# Altium PCB DynamicComplexModulo_v1i1.PcbDoc
Units mm, origin at the board's own origin, x right, y up, seen from the top; angles counter-clockwise.
Board outline 30 x 68 mm, 4 copper layers (Component Side, Ground Plane, Power Plane, Solder Side), stack 0.844 mm thick; 45 components, 50 nets, 246 pads, 42 vias.
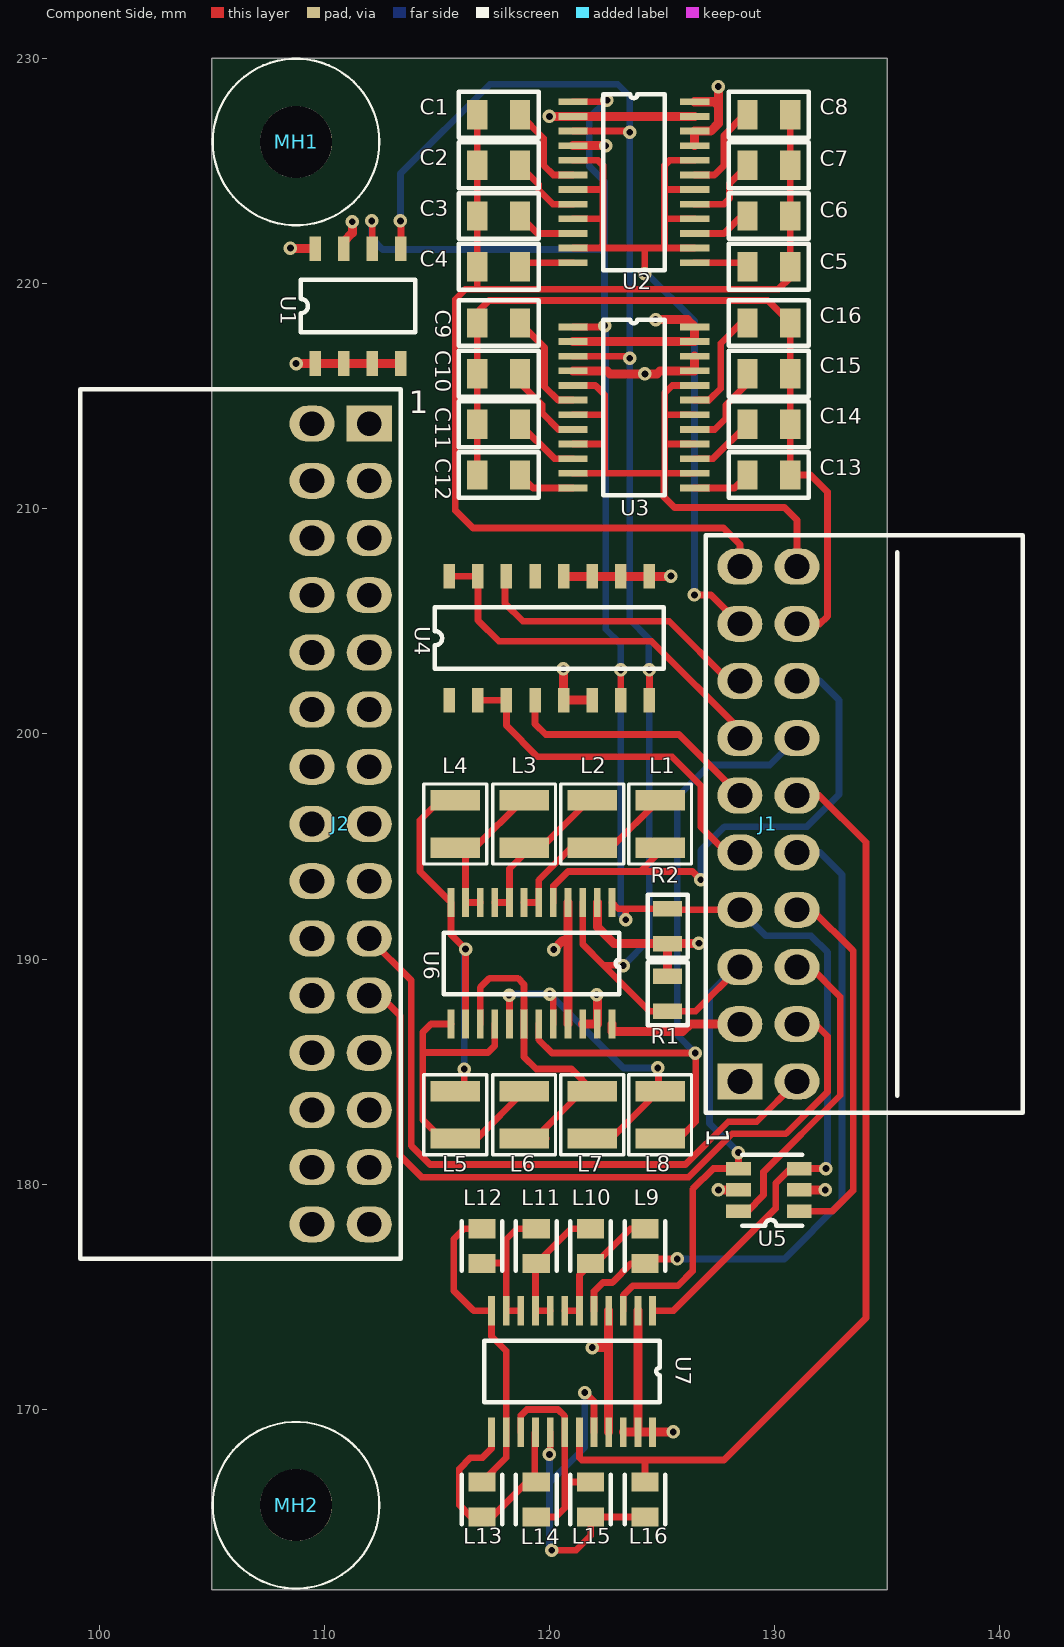
[diagram p0: Component Side view]
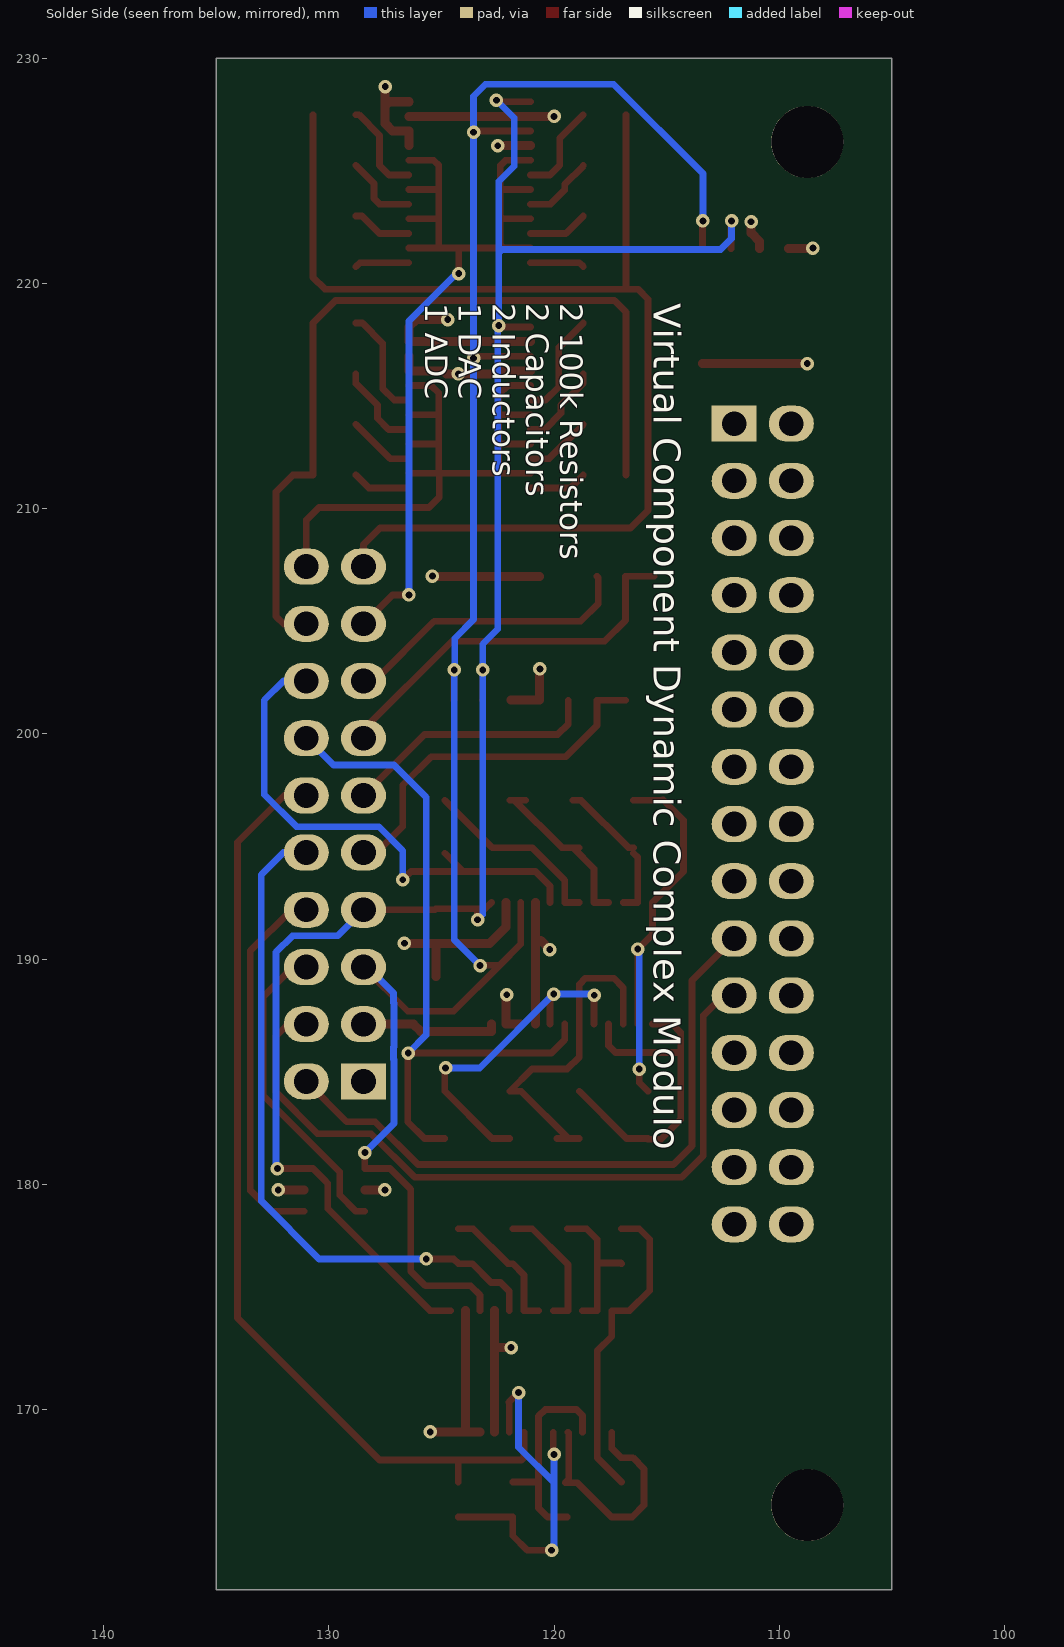
[diagram p1: Solder Side view, seen from below]
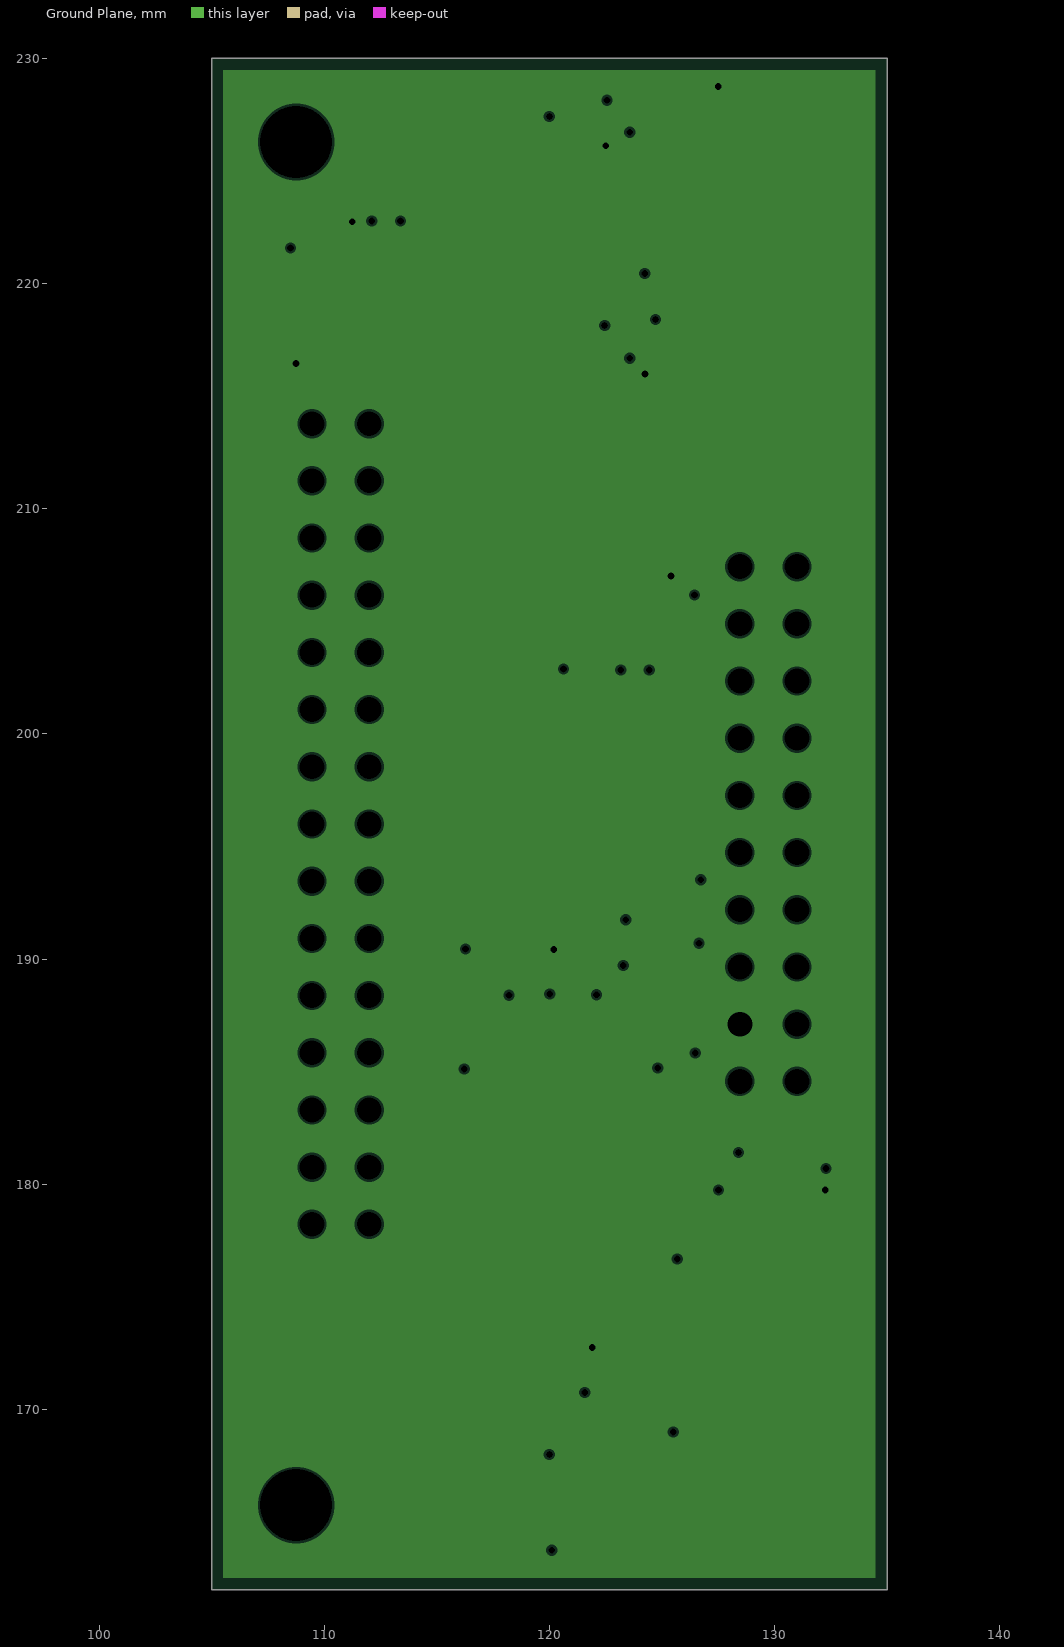
[diagram p2: Ground Plane, clearances drawn from the general rule]
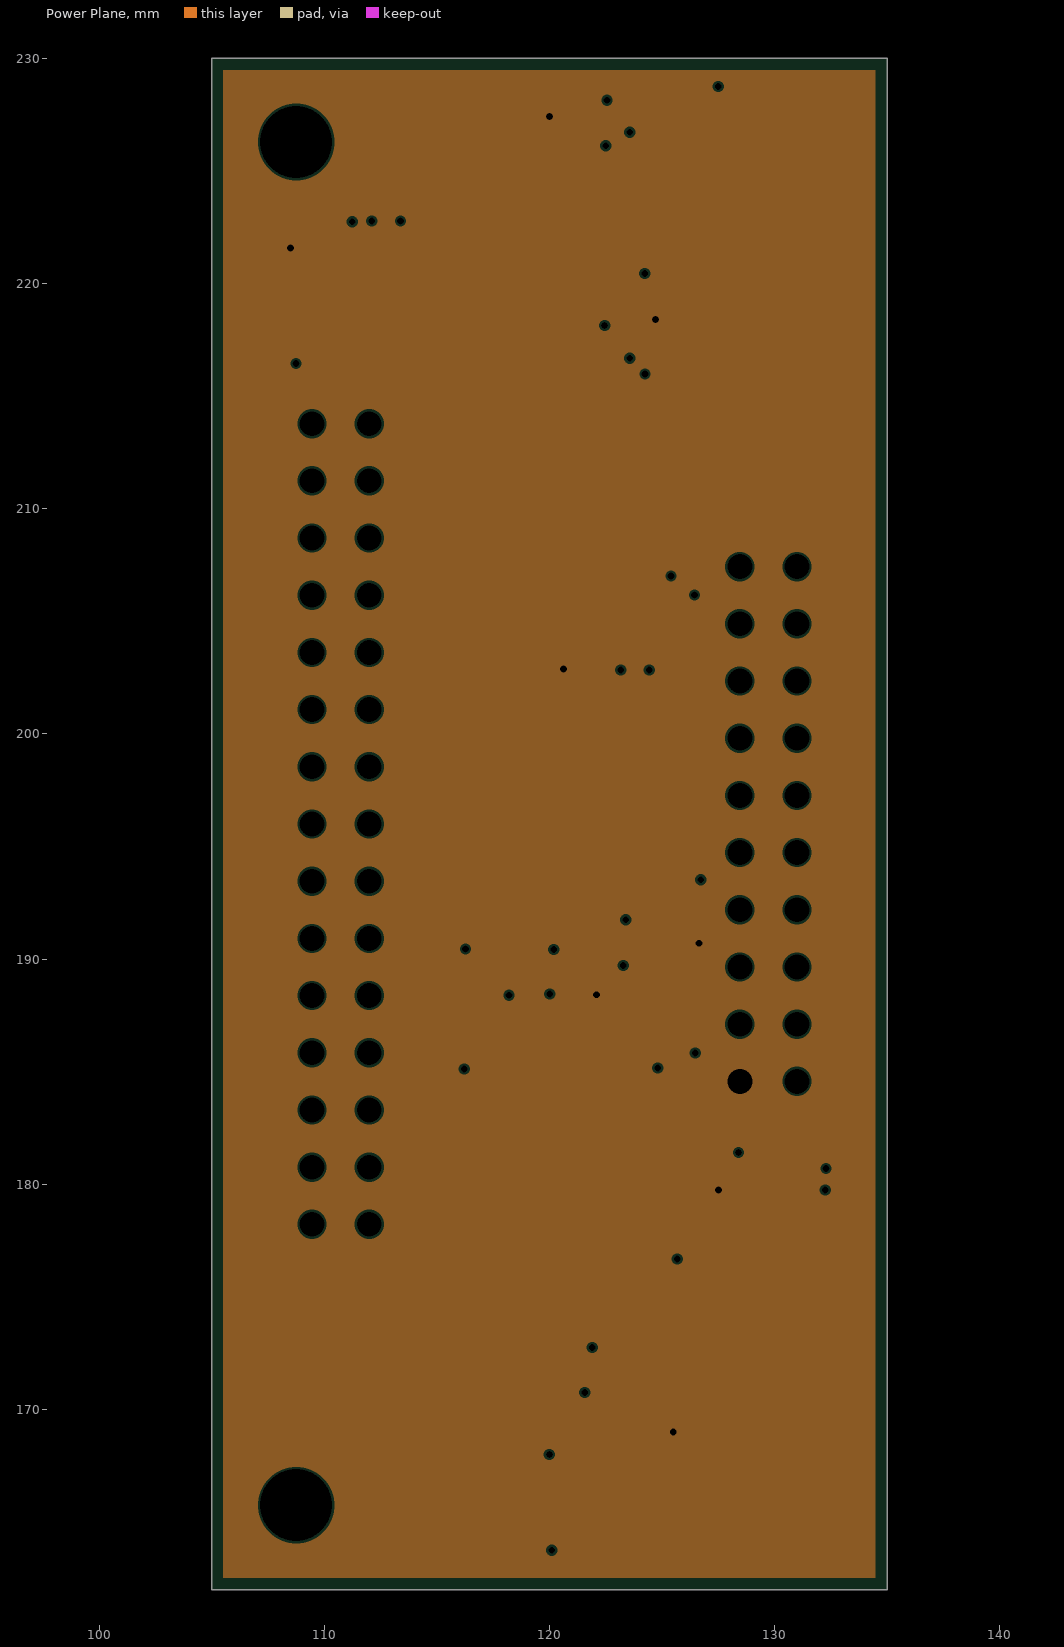
[diagram p3: Power Plane, clearances drawn from the general rule]
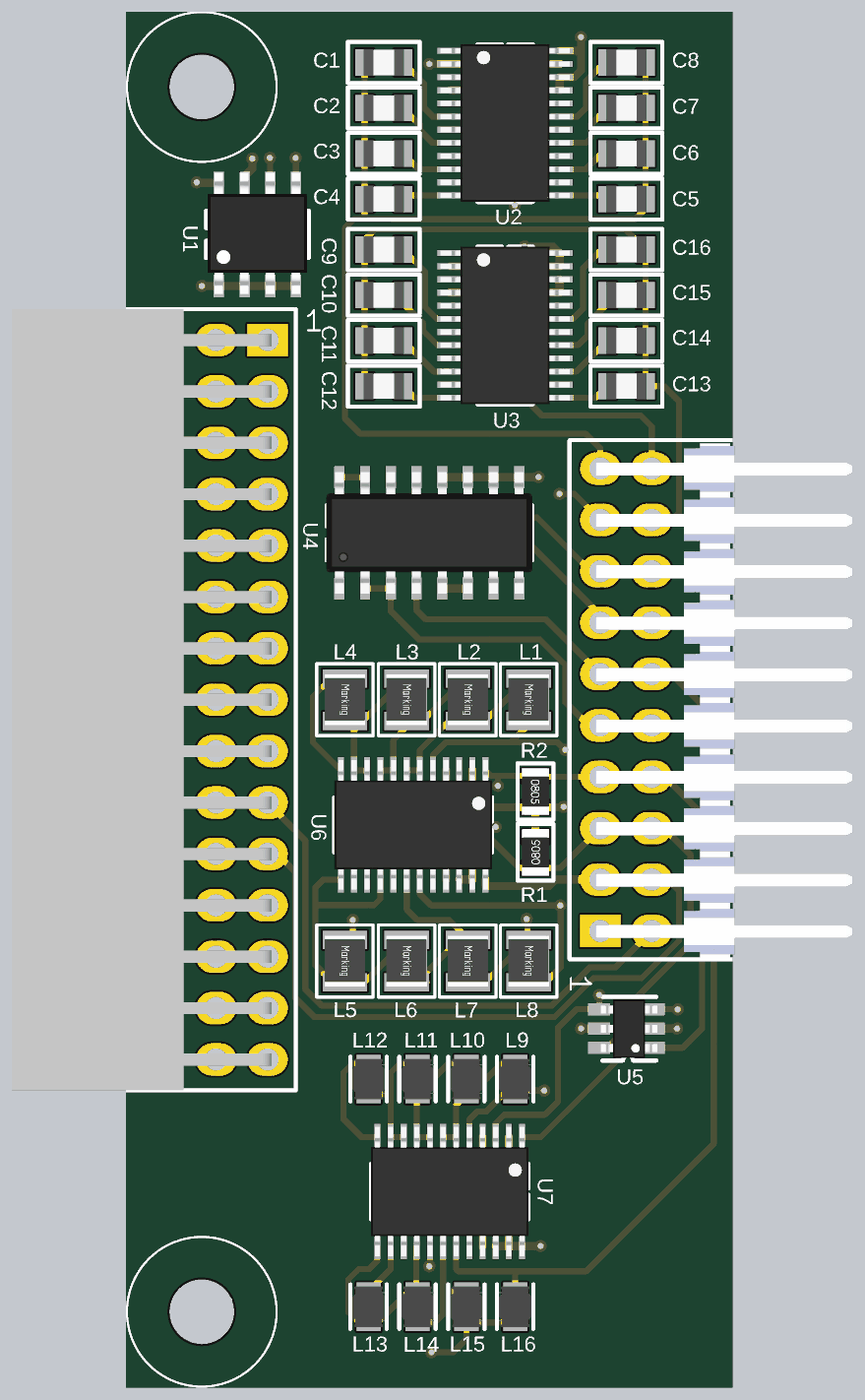
[diagram p4: 3D render of the assembled board from above, using the file's embedded part models]

## Layer stack, top to bottom
Top Solder: solder mask 0.0102, Solder Resist, Dk 3.5
Component Side: signal copper 0.0356
Dielectric 1: core 0.32, FR-4, Dk 4.8
Ground Plane: plane copper 0.036, net GND
Dielectric 3: prepreg 0.127, Dk 4.2
Power Plane: plane copper 0.036, net +5
Dielectric 4: core 0.254, Dk 4.2
Solder Side: signal copper 0.0356
Bottom Solder: solder mask 0.0102, Solder Resist, Dk 3.5

## Board outline
105,162 105,230 135,230 135,162

## Design rules (kind name [scope] priority, off if disabled: settings)
Clearance "Around polygon" [IsRegion] p1: gap=0.3 ignorepadtopadclearanceinfootprint=FALSE
Clearance [All] p2: gap=0.2 ignorepadtopadclearanceinfootprint=FALSE
ComponentClearance [All] p1: gap=0.2 collisioncheckmode=3 verticalgap=0.2 showdistances=FALSE
HoleSize [All] p1: absolutevalues=TRUE maxlimit=3.5 minlimit=0.2 maxpercent=80.000 minpercent=20.000
HoleToHoleClearance [All] p1: gap=0.305 allowstackedmicrovias=TRUE
MinimumSolderMaskSliver [All] p1: minsoldermaskwidth=0.3
PlaneClearance [All] p1: clearance=0.1
PlaneConnect [All] p1: planeconnectstyle=Direct reliefexpansion=0.508 reliefentries=4 reliefconductorwidth=0.254 reliefairgap=0.254
PolygonConnect [All] p1: connectstyle=Direct reliefconductorwidth=0.254 reliefentries=4 polygonreliefangle="90 Angle" airgapwidth=0.254
RoutingVias [All] p1: holewidth=0.3 width=0.6 viastyle="Through Hole" minholewidth=0.3 minwidth=0.6 maxholewidth=0.3 maxwidth=0.6
SilkToSilkClearance [All] p1: silktosilkclearance=0.1
SilkToSolderMaskClearance [IsPad] p1: minsilkscreentomaskgap=0.1 clearancetoexposedcopper=TRUE
SolderMaskExpansion [All] p1: expansion=0.1
Width Width_POWER [InNet ('+*') or InNet('GND')] p1: maxlimit=3 minlimit=0.4 preferedwidth=0.4
Width [All] p2: maxlimit=0.5 minlimit=0.3 preferedwidth=0.4
22 further rules are at their usual default settings.

## Classes and differential pairs
component class VirtualInductor: L1 L2 L3 L4 L5 L6 L7 L8 L9 L10 L11 L12 L13 L14 L15 L16 U6 U7
component class VirtualCap: C1 C2 C3 C4 C5 C6 C7 C8 C9 C10 C11 C12 C13 C14 C15 C16 U2 U4
component class DynamicComplexModulo_v1i1: J1 J2 MH1 MH2 R1 R2 U3 U4 U5

## Components (designator, comment, footprint, x,y, rotation, side; value= is the part's Value field where it differs from the comment)
C1 "100p" C0805 117.75,227.5 r180 top
C2 "200p" C0805 117.75,225.25 r180 top
C3 "330p" C0805 117.75,223 r180 top
C4 "470p" C0805 117.75,220.75 r180 top
C5 "1n" C0805 129.75,220.75 r0 top
C6 "2.2n" C0805 129.75,223 r0 top
C7 "3.3n" C0805 129.75,225.25 r0 top
C8 "4.7n" C0805 129.75,227.5 r0 top
C9 "10n" C0805 117.75,218.25 r180 top
C10 "22n" C0805 117.75,216 r180 top
C11 "33n" C0805 117.75,213.75 r180 top
C12 "47n" C0805 117.75,211.5 r180 top
C13 "100n" C0805 129.75,211.5 r0 top
C14 "220n" C0805 129.75,213.75 r0 top
C15 "330n" C0805 129.75,216 r0 top
C16 "470n" C0805 129.75,218.25 r0 top
J1 "PRPC010DBAN-M71RC" HDR_MALE_10x2x2.54 128.46,184.57 r180 top locked
J2 "PPPC152LJBN-RC" HDR_FEMALE_15x2x2.54 111.492,213.78 r0 top locked
L1 "WE-KI, 744762110A" WE-KI_1008A 124.914,196 r270 top value=10nH
L2 "WE-KI, 744762127A" WE-KI_1008A 121.905,196 r270 top value=27nH
L3 "WE-KI, 744762139A" WE-KI_1008A 118.877,196 r270 top value=39nH
L4 "WE-KI, 744762168A" WE-KI_1008A 115.824,196 r270 top value=68nH
L5 "WE-KI, 744762210A" WE-KI_1008A 115.824,183.082 r270 top value=100nH
L6 "WE-KI, 744762215A" WE-KI_1008A 118.877,183.082 r270 top value=150nH
L7 "WE-KI, 744762222A" WE-KI_1008A 121.905,183.082 r270 top value=220nH
L8 "WE-KI, 744762233A" WE-KI_1008A 124.914,183.082 r270 top value=330nH
L9 "1 uH" WE-LQS_2010 124.25,177.25 r270 top
L10 "1.5 uH" WE-LQS_2010 121.833,177.25 r270 top
L11 "2.2 uH" WE-LQS_2010 119.417,177.25 r270 top
L12 "2.5 uH" WE-LQS_2010 117,177.25 r270 top
L13 "3.3 uH" WE-LQS_2010 117,166 r270 top
L14 "4.7 uH" WE-LQS_2010 119.417,166 r270 top
L15 "6.8 uH" WE-LQS_2010 121.833,166 r270 top
L16 "10 uH" WE-LQS_2010 124.25,166 r90 top
MH1 "MH 3.2mm NP" MH3.2mm 108.75,226.289 r0 top
MH2 "MH 3.2mm NP" MH3.2mm 108.75,165.75 r0 top
R1 "4.7k" R0805 125.25,188.46 r90 top
R2 "4.7k" R0805 125.25,191.46 r270 top
U1 "AT24C256C-SSHL-B" AT24C256C-SSHL-B 111.5,219 r90 top
U2 "ADG715BRUZ" ADG715BRUZ 123.75,224.5 r0 top
U3 "ADG715BRUZ" ADG715BRUZ 123.75,214.5 r0 top
U4 "AD5242BRZ100" AD5242BRZ100 120,204.25 r90 top
U5 "296-14461-1-ND" SOT23-6 129.75,179.75 r180 top
U6 "ADG715BRUZ_1" ADG715BRUZ 119.202,189.814 r270 top
U7 "ADG715BRUZ_1" ADG715BRUZ 121.009,171.688 r270 top

## Footprints (in the part's own frame and the unit in brackets; to place one, negate y for a bottom-side part, rotate by r counter-clockwise, add the part's x,y. Pads: shape width x height; smd on the part's side, far side on the other; paste and mask are expansions set on the pad)
AD5242BRZ100 [mm]
  rect 1.1x0.51 smd mask+0.02: 1(-2.75,4.445) 2(-2.75,3.175) 3(-2.75,1.905) 4(-2.75,0.635) 5(-2.75,-0.635) 6(-2.75,-1.905) 7(-2.75,-3.175) 8(-2.75,-4.445) 9(2.75,-4.445) 10(2.75,-3.175) 11(2.75,-1.905) 12(2.75,-0.635) 13(2.75,0.635) 14(2.75,1.905) 15(2.75,3.175) 16(2.75,4.445)
  silkscreen extent -1.37,-5.08 1.37,5.08, body extent -3,-5.1 3,5.1, height 1.7
ADG715BRUZ [mm]
  rect 1.3x0.3 smd mask+0.02: 1(-2.7,3.575) 2(-2.7,2.925) 3(-2.7,2.275) 4(-2.7,1.625) 5(-2.7,0.975) 6(-2.7,0.325) 7(-2.7,-0.325) 8(-2.7,-0.975) 9(-2.7,-1.625) 10(-2.7,-2.275) 11(-2.7,-2.925) 12(-2.7,-3.575) 13(2.7,-3.575) 14(2.7,-2.925) 15(2.7,-2.275) 16(2.7,-1.625) 17(2.7,-0.975) 18(2.7,-0.325) 19(2.7,0.325) 20(2.7,0.975) 21(2.7,1.625) 22(2.7,2.275) 23(2.7,2.925) 24(2.7,3.575)
  silkscreen extent -1.37,-3.9 1.37,3.9, body extent -3.2,-3.9 3.2,3.9, height 1.06
AT24C256C-SSHL-B [mm]
  rect 1.1x0.51 smd mask+0.02: 1(-2.55,1.905) 2(-2.55,0.635) 3(-2.55,-0.635) 4(-2.55,-1.905) 5(2.55,-1.905) 6(2.55,-0.635) 7(2.55,0.635) 8(2.55,1.905)
  silkscreen extent -1.17,-2.54 1.17,2.54, body extent -2.95,-2.44 3.05,2.46, height 1.75
C0805 [mm]
  rect 0.9x1.3 smd: 1(-0.95,0) 2(0.95,0)
  silkscreen extent -1.78,-1.02 1.78,1.02, body extent -1,-0.66 1,0.66, height 0.74
HDR_FEMALE_15x2x2.54 [mm]
  rect 2x1.6 hole 1.1: 1(0.508,0)
  oval 2x1.6 hole 1.1: 2(-2.032,0) 3(0.508,-2.54) 4(-2.032,-2.54) 5(0.508,-5.08) 6(-2.032,-5.08) 7(0.508,-7.62) 8(-2.032,-7.62) 9(0.508,-10.16) 10(-2.032,-10.16) 11(0.508,-12.7) 12(-2.032,-12.7) 13(0.508,-15.24) 14(-2.032,-15.24) 15(0.508,-17.78) 16(-2.032,-17.78) 17(0.508,-20.32) 18(-2.032,-20.32) 19(0.508,-22.86) 20(-2.032,-22.86) 21(0.508,-25.4) 22(-2.032,-25.4) 23(0.508,-27.94) 24(-2.032,-27.94) 25(0.508,-30.48) 26(-2.032,-30.48) 27(0.508,-33.02) 28(-2.032,-33.02) 29(0.508,-35.56) 30(-2.032,-35.56)
  silkscreen extent -12.32,-37.08 1.91,1.52, body extent -12.14,-37.08 0.71,1.52, height 5.08
HDR_MALE_10x2x2.54 [mm] "PRPC010DBAN-M71RC"
  rect 2x1.6 hole 1.1: 1(0,0)
  oval 2x1.6 hole 1.1: 2(0,-2.54) 4(0,-7.62) 5(0,-10.16) 6(0,-12.7) 7(0,-15.24) 8(0,-17.78) 9(0,-20.32) 10(0,-22.86) 11(-2.54,-22.86) 12(-2.54,-20.32) 13(-2.54,-17.78) 14(-2.54,-15.24) 15(-2.54,-12.7) 16(-2.54,-10.16) 17(-2.54,-7.62) 19(-2.54,-2.54) 20(-2.54,0)
  oval 2x1.6 hole 1.1 mask+0.102: 3(0,-5.08) 18(-2.54,-5.08)
  silkscreen extent -12.57,-24.26 1.52,1.4, body extent -12.47,-24.1 0.25,1.3, height 5.45
MH3.2mm [mm] "MHNP 3.2mm"
  round 3.2 hole 3.2 unplated: 1(0,0)
  silkscreen extent -3.7,-3.7 3.7,3.7
R0805 [mm]
  rect 0.7x1.3 smd: 1(-0.775,0) 2(0.775,0)
  silkscreen extent -1.4,-0.89 1.4,0.89, body extent -1.15,-0.67 1.15,0.68, height 0.77
SOT23-6 [mm]
  rect 1.1x0.6 smd mask+0.02: 1(-1.35,0.95) 2(-1.35,0) 3(-1.35,-0.95) 4(1.35,-0.95) 5(1.35,0) 6(1.35,0.95)
  silkscreen extent -1.48,-1.56 1.19,1.59, body extent -1.53,-1.44 1.27,1.46, height 1.45
WE-KI_1008A [mm] "SMD Wire Wound Ceramic Inductor, body 2.5x2"
  rect 0.9x2.2 smd: 1(-1.05,0) 2(1.05,0)
  silkscreen extent -1.78,-1.4 1.78,1.4, body extent -1.25,-1 1.25,1, height 1.12
WE-LQS_2010 [mm] "SMD Power Inductor, 2-Leads, body 2.2x1.8mm"
  rect 0.85x1.2 smd: 1(-0.775,0) 2(0.775,0)
  silkscreen extent -1.1,-0.9 1.1,0.9, body extent -1,-0.8 1,0.82, height 1.01

## Part data
C1: library part C805_100p
C2: library part C805_200p
C3: library part C805_330p
C4: library part C805_470p
C5: library part C805_1n
C6: library part C805_2.2n
C7: library part C805_3.3n
C8: library part C805_4.7n
C9: library part C805_10n
C10: library part C805_22n
C11: library part C805_33n
C12: library part C805_47n
C13: library part C805_100n
C14: library part C805_220n
C15: library part C805_330n
C16: library part C805_470n
J1: library part "HDR Male 2x10_2.54", "20 Positions Header, Unshrouded, Breakaway Connector 0.100\" (2.54mm) Through Hole, Right Angle Gold", Colour=Black, Manufacturer=Sullins, Package Quantity=1, Supplier Part Number 1=S2111EC-10-ND, ComponentLink1Description=https://datasheet.ciiva.com/741/xrxczzzdxxn-m71rc-11639-b-741675.pdf, ComponentLink1URL=https://datasheet.ciiva.com/741/xrxczzzdxxn-m71rc-11639-b-741675.pdf, Connector Type="Male Pin", Contact Mating Length=0.23inch, Contact Plating=Gold, Manufacturer Part Number=PRPC010DBAN-M71RC, Mount="Through Hole", Number of Positions=20, Number of Rows=2, Packaging=Bulk, Pitch=0.1inch, Pricing 1="1=1.08, 10=0.97, 100=0.7989, 500=0.6315, 1000=0.5421, 5000=0.49455, 10000=0.47553 (USD)", Row Spacing=0.1inch, Stock 1=459, Supplier 1=Digi-Key, System=Connector, Termination=Solder
J2: library part OPENSCOPE_CONNECTOR, "CONN FMALE 30POS DL .1\" R/A GOLD", Colour=Black, Manufacturer=Sullins, Package Quantity=1000, Supplier Part Number 1=S5568-ND, ComponentLink1Description=http://sullinscorp.com/drawings/101_P(N)PxCxx2LJBN-RC,_10494-H.pdf, ComponentLink1URL=http://sullinscorp.com/drawings/101_P(N)PxCxx2LJBN-RC,_10494-H.pdf, Connector Type=Socket,Header, Contact Material=Bronze, Contact Plating=Gold, Height=5mm, Housing Colour=Black, Housing Material=Plastic, Lead Free="Lead Free", Length=38.6mm, Manufacturer Part Number=PPPC152LJBN-RC, Mount="Through Hole", Number of Positions=30, Number of Rows=2, Packaging=Bulk, Pitch=0.1inch, Pricing 1="1=2.22, 10=2.018, 100=1.7294, 500=1.44112, 1000=1.23525, 5000=1.1895 (USD)", Row Spacing=0.1inch, Stock 1=2029, Supplier 1=Digi-Key, Termination=Solder, Width=8.5mm
L1: "WE-KI SMD Wire Wound Ceramic Inductor, size 1008A, 10nH", PartNumber=744762110A, Supplier Part Number 1=732-1808-6-ND, ComponentLink1Description=Manufacturer, ComponentLink1URL=http://www.we-online.de, ComponentLink2Description=Datasheet, ComponentLink2URL=http://katalog.we-online.de/pbs/datasheet/744762110A.pdf, PublishedDate="Sep. 2016", Publisher="Wurth Elektronik", Size=1008A, Supplier 1=Digi-Key
L2: "WE-KI SMD Wire Wound Ceramic Inductor, size 1008A, 27nH", PartNumber=744762127A, Supplier Part Number 1=732-1813-6-ND, ComponentLink1Description=Manufacturer, ComponentLink1URL=http://www.we-online.de, ComponentLink2Description=Datasheet, ComponentLink2URL=http://katalog.we-online.de/pbs/datasheet/744762127A.pdf, PublishedDate="Sep. 2016", Publisher="Wurth Elektronik", Size=1008A, Supplier 1=Digi-Key
L3: "WE-KI SMD Wire Wound Ceramic Inductor, size 1008A, 39nH", PartNumber=744762139A, Supplier Part Number 1=732-1815-6-ND, ComponentLink1Description=Manufacturer, ComponentLink1URL=http://www.we-online.de, ComponentLink2Description=Datasheet, ComponentLink2URL=http://katalog.we-online.de/pbs/datasheet/744762139A.pdf, PublishedDate="Sep. 2016", Publisher="Wurth Elektronik", Size=1008A, Supplier 1=Digi-Key
L4: "WE-KI SMD Wire Wound Ceramic Inductor, size 1008A, 68nH", PartNumber=744762168A, Supplier Part Number 1=732-1818-6-ND, ComponentLink1Description=Manufacturer, ComponentLink1URL=http://www.we-online.de, ComponentLink2Description=Datasheet, ComponentLink2URL=http://katalog.we-online.de/pbs/datasheet/744762168A.pdf, PublishedDate="Sep. 2016", Publisher="Wurth Elektronik", Size=1008A, Supplier 1=Digi-Key
L5: "WE-KI SMD Wire Wound Ceramic Inductor, size 1008A, 100nH", PartNumber=744762210A, Supplier Part Number 1=732-1820-6-ND, ComponentLink1Description=Manufacturer, ComponentLink1URL=http://www.we-online.de, ComponentLink2Description=Datasheet, ComponentLink2URL=http://katalog.we-online.de/pbs/datasheet/744762210A.pdf, PublishedDate="Sep. 2016", Publisher="Wurth Elektronik", Size=1008A, Supplier 1=Digi-Key
L6: "WE-KI SMD Wire Wound Ceramic Inductor, size 1008A, 150nH", PartNumber=744762215A, Supplier Part Number 1=732-1822-6-ND, ComponentLink1Description=Manufacturer, ComponentLink1URL=http://www.we-online.de, ComponentLink2Description=Datasheet, ComponentLink2URL=http://katalog.we-online.de/pbs/datasheet/744762215A.pdf, PublishedDate="Sep. 2016", Publisher="Wurth Elektronik", Size=1008A, Supplier 1=Digi-Key
L7: "WE-KI SMD Wire Wound Ceramic Inductor, size 1008A, 220nH", PartNumber=744762222A, Supplier Part Number 1=732-1824-6-ND, ComponentLink1Description=Manufacturer, ComponentLink1URL=http://www.we-online.de, ComponentLink2Description=Datasheet, ComponentLink2URL=http://katalog.we-online.de/pbs/datasheet/744762222A.pdf, PublishedDate="Sep. 2016", Publisher="Wurth Elektronik", Size=1008A, Supplier 1=Digi-Key
L8: "WE-KI SMD Wire Wound Ceramic Inductor, size 1008A, 330nH", PartNumber=744762233A, Supplier Part Number 1=732-1826-6-ND, ComponentLink1Description=Manufacturer, ComponentLink1URL=http://www.we-online.de, ComponentLink2Description=Datasheet, ComponentLink2URL=http://katalog.we-online.de/pbs/datasheet/744762233A.pdf, PublishedDate="Sep. 2016", Publisher="Wurth Elektronik", Size=1008A, Supplier 1=Digi-Key
L9: library part 74404020010, "WE-LQS SMD Power Inductor, size 2010, 1 uH, 1.49 A", DC Resistance="0.095 Ohm", Manufacturer="Wurth Electronics", Operating Temperature="-40 to +125 degC", Rated Current max.="1.49 A", Supplier Part Number 1=732-10739-6-ND, ComponentLink1Description=Manufacturer, ComponentLink1URL=http://www.we-online.de, ComponentLink2Description=Datasheet, ComponentLink2URL=http://katalog.we-online.de/pbs/datasheet/74404020010.pdf, Inductance="1 uH", Manufacturer Part Number=74404020010, Part Number=74404020010, Pricing 1="1=0.56, 50=0.4698, 100=0.357, 1000=0.31007 (USD)", Published Date="Dec. 2017", Publisher="Wurth Elektronik", Size=2010, Stock 1=3959, Supplier 1=Digi-Key
L10: library part 74404020015, "WE-LQS SMD Power Inductor, size 2010, 1.5 uH, 1.19 A", DC Resistance="0.145 Ohm", Manufacturer="Wurth Electronics", Operating Temperature="-40 to +125 degC", Rated Current max.="1.19 A", Supplier Part Number 1=732-10740-6-ND, ComponentLink1Description=Manufacturer, ComponentLink1URL=http://www.we-online.de, ComponentLink2Description=Datasheet, ComponentLink2URL=http://katalog.we-online.de/pbs/datasheet/74404020015.pdf, Inductance="1.5 uH", Manufacturer Part Number=74404020015, Part Number=74404020015, Pricing 1="1=0.56, 50=0.4698, 100=0.357, 1000=0.31007 (USD)", Published Date="Dec. 2017", Publisher="Wurth Elektronik", Size=2010, Stock 1=3931, Supplier 1=Digi-Key
L11: library part 74404020022, "WE-LQS SMD Power Inductor, size 2010, 2.2 uH, 0.96 A", DC Resistance="0.22 Ohm", Manufacturer="Wurth Electronics", Operating Temperature="-40 to +125 degC", Rated Current max.="0.96 A", Supplier Part Number 1=732-10741-6-ND, ComponentLink1Description=Manufacturer, ComponentLink1URL=http://www.we-online.de, ComponentLink2Description=Datasheet, ComponentLink2URL=http://katalog.we-online.de/pbs/datasheet/74404020022.pdf, Inductance="2.2 uH", Manufacturer Part Number=74404020022, Part Number=74404020022, Pricing 1="1=0.56, 50=0.4698, 100=0.357, 1000=0.31007 (USD)", Published Date="Dec. 2017", Publisher="Wurth Elektronik", Size=2010, Stock 1=3236, Supplier 1=Digi-Key
L12: library part 74405020022, "WE-LQS SMD Power Inductor, size 2010, 2.5 uH, 0.96 A", DC Resistance="0.22 Ohm", Inductance="2.2 uH", Manufacturer="Wurth Electronics", Manufacturer Part Number=74404020022, Operating Temperature="-40 to +125 degC", Rated Current max.="0.96 A", Supplier Part Number 1=732-10770-6-ND, ComponentLink1Description=Manufacturer, ComponentLink1URL=http://www.we-online.de, ComponentLink2Description=Datasheet, ComponentLink2URL=http://katalog.we-online.de/pbs/datasheet/74404020022.pdf, Part Number=74404020022, Pricing 1="1=0.63, 50=0.522, 100=0.3967, 1000=0.34451 (USD)", Published Date="Dec. 2017", Publisher="Wurth Elektronik", Size=2010, Stock 1=4000, Supplier 1=Digi-Key
L13: library part 74404020033, "WE-LQS SMD Power Inductor, size 2010, 3.3 uH, 0.87 A", DC Resistance="0.279 Ohm", Manufacturer="Wurth Electronics", Operating Temperature="-40 to +125 degC", Rated Current max.="0.87 A", Supplier Part Number 1=732-10742-6-ND, ComponentLink1Description=Manufacturer, ComponentLink1URL=http://www.we-online.de, ComponentLink2Description=Datasheet, ComponentLink2URL=http://katalog.we-online.de/pbs/datasheet/74404020033.pdf, Inductance="3.3 uH", Manufacturer Part Number=74404020033, Part Number=74404020033, Pricing 1="1=0.56, 50=0.4698, 100=0.357, 1000=0.31007 (USD)", Published Date="Dec. 2017", Publisher="Wurth Elektronik", Size=2010, Stock 1=3787, Supplier 1=Digi-Key
L14: library part 74404020047, "WE-LQS SMD Power Inductor, size 2010, 4.7 uH, 0.73 A", DC Resistance="0.399 Ohm", Manufacturer="Wurth Electronics", Operating Temperature="-40 to +125 degC", Rated Current max.="0.73 A", Supplier Part Number 1=732-10743-6-ND, ComponentLink1Description=Manufacturer, ComponentLink1URL=http://www.we-online.de, ComponentLink2Description=Datasheet, ComponentLink2URL=http://katalog.we-online.de/pbs/datasheet/74404020047.pdf, Inductance="4.7 uH", Manufacturer Part Number=74404020047, Part Number=74404020047, Pricing 1="1=0.56, 50=0.4698, 100=0.357, 1000=0.31007 (USD)", Published Date="Dec. 2017", Publisher="Wurth Elektronik", Size=2010, Stock 1=3398, Supplier 1=Digi-Key
L15: library part 74404020068, "WE-LQS SMD Power Inductor, size 2010, 6.8 uH, 0.56 A", DC Resistance="0.68 Ohm", Manufacturer="Wurth Electronics", Operating Temperature="-40 to +125 degC", Rated Current max.="0.56 A", Supplier Part Number 1=732-10744-6-ND, ComponentLink1Description=Manufacturer, ComponentLink1URL=http://www.we-online.de, ComponentLink2Description=Datasheet, ComponentLink2URL=http://katalog.we-online.de/pbs/datasheet/74404020068.pdf, Inductance="6.8 uH", Manufacturer Part Number=74404020068, Part Number=74404020068, Pricing 1="1=0.56, 50=0.4698, 100=0.357, 1000=0.31007 (USD)", Published Date="Dec. 2017", Publisher="Wurth Elektronik", Size=2010, Stock 1=3558, Supplier 1=Digi-Key
L16: library part 74404020100, "WE-LQS SMD Power Inductor, size 2010, 10 uH, 0.5 A", DC Resistance="0.85 Ohm", Manufacturer="Wurth Electronics", Operating Temperature="-40 to +125 degC", Rated Current max.="0.5 A", Supplier Part Number 1=732-10745-6-ND, ComponentLink1Description=Manufacturer, ComponentLink1URL=http://www.we-online.de, ComponentLink2Description=Datasheet, ComponentLink2URL=http://katalog.we-online.de/pbs/datasheet/74404020100.pdf, ComponentLink3Description=http://www.farnell.com/datasheets/2277209.pdf, ComponentLink3URL=http://www.farnell.com/datasheets/2277209.pdf, Inductance="10 uH", Manufacturer Part Number=74404020100, Part Number=74404020100, Pricing 1="1=0.56, 50=0.4698, 100=0.357, 1000=0.31007 (USD)", Published Date="Dec. 2017", Publisher="Wurth Elektronik", Size=2010, Stock 1=3185, Supplier 1=Digi-Key
MH1 MH2: library part MHNP, "Mounting hole 3.2mm non plated"
R1 R2: library part R0805_4.7k
U1: "ATMEL         AT24C256C-SSHL-B            EEPROM, 256 Kbit, 32K x 8bit, 1 MHz, Serial, SOIC, 8 Pins", Case/Package=SOIC, Frequency=1MHz, Manufacturer="Microchip / Atmel", Max Operating Temperature=85°C, Max Supply Voltage=5.5V, Min Operating Temperature=-40°C, Min Supply Voltage=1.7V, Nominal Supply Current=3mA, Package Quantity=100, Supplier Part Number 1=AT24C256C-SSHL-B-ND, Voltage=5V, Access Time=550ns, ComponentLink1Description=https://datasheet.ciiva.com/15123/getdatasheetpartid-367456-15123424.pdf, ComponentLink1URL=https://datasheet.ciiva.com/15123/getdatasheetpartid-367456-15123424.pdf, ComponentLink2Description=https://datasheet.ciiva.com/15123/getdatasheetpartid-304516-15123348.pdf, ComponentLink2URL=https://datasheet.ciiva.com/15123/getdatasheetpartid-304516-15123348.pdf, ComponentLink3Description=https://datasheet.ciiva.com/1910/atmel-8568-seeprom-at24c256c-datasheet-1910422.pdf, ComponentLink3URL=https://datasheet.ciiva.com/1910/atmel-8568-seeprom-at24c256c-datasheet-1910422.pdf, ComponentLink4Description=https://datasheet.ciiva.com/1509/1726561-1509879.pdf, ComponentLink4URL=https://datasheet.ciiva.com/1509/1726561-1509879.pdf, Contact Plating=Tin,Matte, Density=256Kb, Height=1.5mm, Interface=I2C,Serial,2-Wire, Length=5.05mm, Manufacturer Part Number=AT24C256C-SSHL-B, Max Frequency=1MHz, Memory Size=256Kb, Memory Type=EEPROM, Mount="Surface Mount", Number of Pins=8, Number of Words=32768, Packaging=Bulk, Pricing 1="1=0.68, 10=0.619, 25=0.6108, 100=0.543 (USD)", Radiation Hardening=No, REACH SVHC="No SVHC", Stock 1=4655, Supplier 1=Digi-Key, Width=3.99mm
U2 U3: "ANALOG DEVICES         ADG715BRUZ            Analogue Switch, Octal Channel, SPST, 8 Channels, 4.5 ohm, 2.7V to 5.5V, TSSOP, 24 Pins", Case/Package=TSSOP, Drain to Source Resistance=2.5R, Dual Supply Voltage=2.5V, High Level Output Current=30mA, Manufacturer="Analog Devices", Max Dual Supply Voltage=2.75V, Max Operating Temperature=85°C, Max Power Dissipation=125uW, Max Supply Current=20uA, Max Supply Voltage=5.5V, Min Dual Supply Voltage=2.25V, Min Operating Temperature=-40°C, Min Supply Voltage=2.7V, On-State Resistance=4.5R, Operating Supply Current=10uA, Package Quantity=62, Supplier Part Number 1=ADG715BRUZ-ND, -3db Bandwidth=155MHz, Bandwidth=155MHz, ComponentLink1Description=https://datasheet.ciiva.com/2978/adg714-715-2978656.pdf, ComponentLink1URL=https://datasheet.ciiva.com/2978/adg714-715-2978656.pdf, ComponentLink2Description=https://datasheet.ciiva.com/1668/adg714-715-1668978.pdf, ComponentLink2URL=https://datasheet.ciiva.com/1668/adg714-715-1668978.pdf, ComponentLink3Description=https://datasheet.ciiva.com/15127/getdatasheetpartid-123058-15127194.pdf, ComponentLink3URL=https://datasheet.ciiva.com/15127/getdatasheetpartid-123058-15127194.pdf, ComponentLink4Description=https://datasheet.ciiva.com/16637/adg714-715-16637994.pdf, ComponentLink4URL=https://datasheet.ciiva.com/16637/adg714-715-16637994.pdf, ComponentLink5Description=https://datasheet.ciiva.com/5797/adg714-715-5797179.pdf, ComponentLink5URL=https://datasheet.ciiva.com/5797/adg714-715-5797179.pdf, ComponentLink6Description=https://datasheet.ciiva.com/48708/001248020-da-01-en-ic-switch-octal-adg715bruz-tssop-24-adi-48708535.pdf, ComponentLink6URL=https://datasheet.ciiva.com/48708/001248020-da-01-en-ic-switch-octal-adg715bruz-tssop-24-adi-48708535.pdf, Contact Plating=Tin,Matte, Height=1.05mm, Interface=Serial, Lead Free="Contains Lead", Length=7.8mm, Manufacturer Part Number=ADG715BRUZ, Nominal Supply Current=20uA, Number of Bits=8, Number of Channels=8, Number of Circuits=8, Number of Inputs=8, Number of Outputs=8, Number of Pins=24, Packaging=Rail/Tube, Power Dissipation=125uW, Pricing 1="1=6.12, 62=5.19758, 124=4.50452, 558=3.83461, 1054=3.234 (USD)", Radiation Hardening=No, REACH SVHC="No SVHC", Stock 1=3027, Supplier 1=Digi-Key, Supply Type=Single,Dual, Throw Configuration=SPST, Turn-Off Delay Time=130ns, Turn-On Delay Time=140ns, Width=4.4mm
U4: library part AD5242BRZ100-REEL7, "IC POT DGTL DUAL 256POS 16SOIC", Case/Package=SOIC, Dual Supply Voltage=2.5V, Frequency=400kHz, Manufacturer="Analog Devices", Max Dual Supply Voltage=2.7V, Max Operating Temperature=105°C, Max Supply Current=100nA, Max Supply Voltage=5.5V, Min Dual Supply Voltage=2.3V, Min Operating Temperature=-40°C, Package Quantity=1000, Resistance=100kR, Temperature Coefficient=30ppm/°C, Tolerance=50%, -3db Bandwidth=650kHz, ComponentLink1Description=https://datasheet.ciiva.com/3046/ad5241-5242-3046354.pdf, ComponentLink1URL=https://datasheet.ciiva.com/3046/ad5241-5242-3046354.pdf, ComponentLink2Description=https://datasheet.ciiva.com/1339/ad5241-5242-1339036.pdf, ComponentLink2URL=https://datasheet.ciiva.com/1339/ad5241-5242-1339036.pdf, Contact Plating=Tin,Matte, Interface=I2C, Lead Free="Contains Lead", Manufacturer Part Number=AD5242BRZ100-REEL7, Memory Type=Volatile, Min Supply Voltage=2.7V, Mount="Surface Mount", Nominal Supply Current=100nA, Number of Circuits=2, Number of Elements=2, Number of Pins=16, Number of Positions=256, Number of Taps=256, Operating Supply Current=100nA, Packaging="Tape and Reel", Quiescent Current=100nA, Stock 1=881, Supplier 1=Digi-Key, Taper=Linear
U5: library part ADS1110A7IDBVT, "IC ADC 16-BIT I2C PROGBL SOT23-6", Case/Package=SOT-23-6, Manufacturer="Texas Instruments", Max Operating Temperature=125°C, Max Power Dissipation=1.75mW, Max Supply Voltage=5.5V, Min Operating Temperature=-40°C, Min Supply Voltage=2.7V, Nominal Supply Current=240uA, Operating Supply Voltage=5V, Package Quantity=250, Supplier Part Number 1=296-14468-6-ND, ComponentLink1Description=https://datasheet.ciiva.com/25993/ads1110-25993414.pdf, ComponentLink1URL=https://datasheet.ciiva.com/25993/ads1110-25993414.pdf, ComponentLink2Description=https://datasheet.ciiva.com/1262/ads1110-1262313.pdf, ComponentLink2URL=https://datasheet.ciiva.com/1262/ads1110-1262313.pdf, ComponentLink3Description=https://datasheet.ciiva.com/1262/ads1110-1262314.pdf, ComponentLink3URL=https://datasheet.ciiva.com/1262/ads1110-1262314.pdf, ComponentLink4Description=https://datasheet.ciiva.com/1262/ads1110-1262315.pdf, ComponentLink4URL=https://datasheet.ciiva.com/1262/ads1110-1262315.pdf, ComponentLink5Description=https://datasheet.ciiva.com/14260/sbas276a-14260046.pdf, ComponentLink5URL=https://datasheet.ciiva.com/14260/sbas276a-14260046.pdf, ComponentLink6Description=https://datasheet.ciiva.com/26800/ads1110a7idbvt-26800806.pdf, ComponentLink6URL=https://datasheet.ciiva.com/26800/ads1110a7idbvt-26800806.pdf, ComponentLink7Description=https://datasheet.ciiva.com/41461/001186690-da-01-en-ic-adc-16-bi-ads1110a7idbvt-sot-23-6-tid-41461014.pdf, ComponentLink7URL=https://datasheet.ciiva.com/41461/001186690-da-01-en-ic-adc-16-bi-ads1110a7idbvt-sot-23-6-tid-41461014.pdf, Contact Plating=Gold, Conversion Rate=128S/s, Differential Nonlinearity=1LSB, Interface=I2C, Lead Free="Lead Free", Manufacturer Part Number=ADS1110A7IDBVT, Mount="Surface Mount", Number of A/D Converters=1, Number of Analog Inputs=1, Number of Bits=16, Number of Channels=1, Number of Converters=1, Number of Elements=1, Number of Inputs=1, Number of Pins=6, Packaging="Tape and Reel", Polarity=Bipolar,Unipolar, Power Dissipation=1.75mW, Pricing 1="1=6.46, 10=5.805, 100=4.7561 (USD)", Radiation Hardening=No, Resolution=16b, Sampling Rate=0.128KS/s, Stock 1=469, Supplier 1=Digi-Key, Supply Type=Single
U6 U7: "ANALOG DEVICES         ADG715BRUZ            Analogue Switch, Octal Channel, SPST, 8 Channels, 4.5 ohm, 2.7V to 5.5V, TSSOP, 24 Pins", Case/Package=TSSOP, Drain to Source Resistance=2.5R, Dual Supply Voltage=2.5V, High Level Output Current=30mA, Manufacturer="Analog Devices", Manufacturer Part Number=ADG715BRUZ, Max Dual Supply Voltage=2.75V, Max Operating Temperature=85°C, Max Power Dissipation=125uW, Max Supply Current=20uA, Max Supply Voltage=5.5V, Min Dual Supply Voltage=2.25V, Min Operating Temperature=-40°C, Min Supply Voltage=2.7V, On-State Resistance=4.5R, Operating Supply Current=10uA, Package Quantity=62, Supplier Part Number 1=ADG715BRUZ-ND, -3db Bandwidth=155MHz, Bandwidth=155MHz, ComponentLink1Description=https://datasheet.ciiva.com/2978/adg714-715-2978656.pdf, ComponentLink1URL=https://datasheet.ciiva.com/2978/adg714-715-2978656.pdf, ComponentLink2Description=https://datasheet.ciiva.com/1668/adg714-715-1668978.pdf, ComponentLink2URL=https://datasheet.ciiva.com/1668/adg714-715-1668978.pdf, ComponentLink3Description=https://datasheet.ciiva.com/15127/getdatasheetpartid-123058-15127194.pdf, ComponentLink3URL=https://datasheet.ciiva.com/15127/getdatasheetpartid-123058-15127194.pdf, ComponentLink4Description=https://datasheet.ciiva.com/16637/adg714-715-16637994.pdf, ComponentLink4URL=https://datasheet.ciiva.com/16637/adg714-715-16637994.pdf, ComponentLink5Description=https://datasheet.ciiva.com/5797/adg714-715-5797179.pdf, ComponentLink5URL=https://datasheet.ciiva.com/5797/adg714-715-5797179.pdf, ComponentLink6Description=https://datasheet.ciiva.com/48708/001248020-da-01-en-ic-switch-octal-adg715bruz-tssop-24-adi-48708535.pdf, ComponentLink6URL=https://datasheet.ciiva.com/48708/001248020-da-01-en-ic-switch-octal-adg715bruz-tssop-24-adi-48708535.pdf, Contact Plating=Tin,Matte, Height=1.05mm, Interface=Serial, Lead Free="Contains Lead", Length=7.8mm, Nominal Supply Current=20uA, Number of Bits=8, Number of Channels=8, Number of Circuits=8, Number of Inputs=8, Number of Outputs=8, Number of Pins=24, Packaging=Rail/Tube, Power Dissipation=125uW, Pricing 1="1=6.12, 62=5.19758, 124=4.50452, 558=3.83461, 1054=3.234 (USD)", Radiation Hardening=No, REACH SVHC="No SVHC", Stock 1=3027, Supplier 1=Digi-Key, Supply Type=Single,Dual, Throw Configuration=SPST, Turn-Off Delay Time=130ns, Turn-On Delay Time=140ns, Width=4.4mm

## Via types
v1: diameter 0.6, hole 0.3, Component Side to Solder Side, tented both sides, 34 vias
v2: diameter 0.6/0.6 (per signal layer), hole 0.3, Component Side to Solder Side, tented both sides, 8 vias

## Nets (pads, with @x,y where several pads share a name; then routed paths per layer and width w, separated by ;. In a path a pad name is that pad's centre, name@x,y a point inside that pad or via, vN(x,y) a via of type N, cw(c..) or ccw(c..) an arc to the next point about the centre after c; other vN are vias at no path point)
+5: J1.1 R1.2 R2.2 U1.8 U2.2 U2.23 U3.2 U3.23 U3.24 U4.5 U4.6 U5.5 U6.2 U6.22 U6.23 U7.2 U7.22 U7.23 U7.24 | length 36
  Component Side w0.4: v1(108.5,221.575) 108.525,221.55 U1.8 ; v1(120,227.425) U2.2 U2.23 ; v1(120.625,202.885) 120.635,202.875 U4.5 U4.6 ; U3.2 U3.23 U3.24 126.125,218.4 v1(124.714,218.4) ; U6.22 U6.23 122.127,188.388 v1(122.098,188.417) ; U6.2 122.127,191.431 122.874,190.685 R2.2 ; U7.22 U7.23 ; U7.2 U7.23 ; R1.2 R2.2 ; v1(125.5,169) 125.488,168.988 U7.24 U7.23 ; v1(126.644,190.703) 126.626,190.685 R2.2 ; v1(127.508,179.75) U5.5
GND: J1.2 U1.1 U1.2 U1.3 U1.4 U1.7 U2.4 U2.21 U2.22 U2.24 U3.4 U3.21 U3.22 U4.9 U4.10 U4.11 U4.12 U5.2 U6.4 U6.21 U6.24 U7.4 U7.21 | length 42.6
  Component Side w0.4: v1(108.75,216.45) U1.1 U1.2 U1.3 U1.4 ; U1.7 110.865,221.865 111.25,222.25 v1(111.25,222.75) ; v1(120.193,190.424) 120.599,190.83 120.827,190.83 ; U4.12 U4.11 U4.10 U4.9 125.39,207 v1(125.4,207.01) ; U6.21 120.827,190.83 ; U6.4 120.827,190.83 ; U3.4 122.559,216.125 122.696,215.987 v1(124.243,215.987) 124.776,215.987 124.914,216.125 U3.21 U3.22 ; U2.4 v1(122.5,226.125) ; v1(121.905,172.75) 122.634,172.75 ; U7.21 122.634,172.75 ; U7.4 122.634,172.75 ; U6.24 122.777,186.792 125.922,186.792 126.245,187.114 128.456,187.114 J1.2 ; U2.21 U2.22 127.166,226.775 127.5,227.109 127.5,227.825 127.5,228 ; U2.24 127.325,228.075 127.4,228 127.5,228 ; v1(127.5,228.75) 127.5,228 ; U5.2 v1(132.25,179.75)
  Solder Side w0.4: v1(125.4,207.01) v1@125.425,207.035
NetC1_1: C1.1 U2.6 | length 4.2
  Component Side w0.3: C1.1 119.75,226.45 119.75,225.25 120.175,224.825 U2.6
NetC2_1: C2.1 U2.8 | length 3.2
  Component Side w0.3: C2.1 118.7,225.23 119.528,224.402 119.528,224.147 120.15,223.525 U2.8
NetC3_1: C3.1 U2.10 | length 2.7
  Component Side w0.3: C3.1 119.475,222.225 U2.10
NetC4_1: C4.1 U2.12 | length 2.4
  Component Side w0.3: C4.1 118.875,220.925 U2.12
NetC5_1: C5.1 U2.13 | length 2.4
  Component Side w0.3: U2.13 128.625,220.925 C5.1
NetC6_1: C6.1 U2.15 | length 2.7
  Component Side w0.3: U2.15 127.75,222.225 128.525,223 C6.1
NetC7_1: C7.1 U2.17 | length 3.5
  Component Side w0.3: U2.17 127.75,223.525 128,223.775 128,224.45 C7.1
NetC8_1: C8.1 U2.19 | length 4.2
  Component Side w0.3: U2.19 127.325,224.825 127.75,225.25 127.75,226.582 128.668,227.5 C8.1
NetC9_1: C9.1 U3.6 | length 4.8
  Component Side w0.3: C9.1 119.786,217.164 119.786,215.417 120.379,214.825 U3.6
NetC10_1: C10.1 U3.8 | length 3.8
  Component Side w0.3: C10.1 118.7,215.589 119.685,214.605 119.685,214.245 120.405,213.525 U3.8
NetC11_1: C11.1 U3.10 | length 3
  Component Side w0.3: C11.1 120.225,212.225 U3.10
NetC12_1: C12.1 U3.12 | length 2.6
  Component Side w0.3: C12.1 119.275,210.925 U3.12
NetC13_1: C13.1 U3.13 | length 2.6
  Component Side w0.3: U3.13 128.225,210.925 C13.1
NetC14_1: C14.1 U3.15 | length 3
  Component Side w0.3: U3.15 127.275,212.225 C14.1
NetC15_1: C15.1 U3.17 | length 4
  Component Side w0.3: U3.17 127.343,213.525 127.838,214.02 127.838,214.605 128.8,215.566 C15.1
NetC16_1: C16.1 U3.19 | length 4.9
  Component Side w0.3: U3.19 127.095,214.825 127.61,215.34 127.61,217.348 128.512,218.25 C16.1
NetL1_1: L1.1 L2.2 U6.6 U6.7 | length 8.4
  Component Side w0.3: U6.7 U6.6 119.527,193.506 120.971,194.95 122.748,194.95 L1.1@124.848,197.05
NetL2_1: L2.1 L3.2 U6.8 U6.9 | length 7.9
  Component Side w0.3: U6.9 U6.8 118.227,194.013 L3.2@119.164,194.95 ; L3.2 L3.2@119.164,194.95 ; L2.1@121.264,197.05 L2.1@121.75,197.05 ; L2.1@121.964,197.05 L2.1 L2.1@121.75,197.05 ; L3.2@119.164,194.95 119.65,194.95 L2.1@121.75,197.05
NetL3_1: L3.1 L4.2 U6.10 U6.11 | length 6.5
  Component Side w0.3: L4.2@116.469,194.7 116.277,194.508 U6.11 U6.10 ; L4.2@116.469,194.95 116.7,194.95 118.8,197.05 L3.1 L3.1@119.164,197.05
NetL4_1: L4.1 L5.1 U6.12 U6.14 | length 19
  Component Side w0.3: U6.12@115.621,192.253 U6.12@115.627,192.259 ; L5.1 116.215,184.523 v1(116.215,185.115) ; U6.14 v1(116.277,190.445) 115.627,191.095 U6.12@115.627,192.259 ; L4.1@116.469,197.05 115.192,197.05 115.164,197.079 114.25,196.165 114.25,193.891 U6.12 U6.12@115.627,192.259
  Solder Side w0.3: v1(116.215,185.115) 116.215,190.383 v1(116.277,190.445)
NetL5_2: L5.2 L6.1 U6.13 U6.16 | length 15.3
  Component Side w0.3: U6.13 114.75,187.114 114.374,186.738 114.374,185.874 ; L5.2@115.824,182 115.25,182 114.374,182.876 114.374,185.874 ; L5.2 116.777,182.032 L6.1 ; U6.16 117.577,186.157 117.272,185.852 114.396,185.852 114.374,185.874
NetL6_2: L6.2 L7.1 U6.15 U6.18 | length 15.2
  Component Side w0.3: U6.15 116.927,188.733 117.348,189.154 118.598,189.154 118.877,188.874 U6.18 118.877,185.655 119.417,185.115 120.981,185.115 L7.1@121.964,184.132 ; L6.2 L6.2@119.359,182.032 ; L6.2@119.864,182.032 L6.2@119.359,182.032 ; L7.1 121.459,184.132 L6.2@119.359,182.032
NetL7_2: L7.2 L8.1 U6.17 U6.20 | length 15.5
  Component Side w0.3: v1(118.212,188.392) 118.227,188.376 U6.17 ; v1(120.015,188.449) 120.11,188.449 120.177,188.382 U6.20 ; L7.2@121.964,182.032 122.748,182.032 124.848,184.132 124.848,185.134 v1(124.816,185.166)
  Solder Side w0.3: v1(118.212,188.392) 118.269,188.449 v1(120.015,188.449) 123.298,185.166 v1(124.816,185.166)
NetL9_1: L9.1 L10.2 U7.6 U7.7 | length 6
  Component Side w0.3: U7.7 U7.6 121.334,175.975 L10.2 122.047,176.475 123.597,178.025 L9.1
NetL10_1: L10.1 L11.2 U7.8 U7.9 | length 5.8
  Component Side w0.3: U7.8 U7.9 119.384,176.442 L11.2 120.967,178.025 L10.1
NetL11_1: L11.1 L12.2 U7.10 U7.11 | length 6.4
  Component Side w0.3: L12.2 117.03,176.505 118.085,176.505 ; U7.10 U7.11 118.084,176.504 118.085,176.505 ; L11.1 118.55,178.025 118.085,177.56 118.085,176.505
NetL12_1: L12.1 L13.1 U7.12 U7.14 | length 14.1
  Component Side w0.3: L13.1 118.084,167.859 U7.14 118.084,172.6 117.434,173.25 U7.12 116.639,174.388 115.75,175.277 115.75,177.56 116.215,178.025 L12.1
NetL13_2: L13.2 L14.1 U7.13 U7.16 | length 10.9
  Component Side w0.3: U7.13 117.434,168.266 117.026,167.859 116.5,167.859 116,167.359 116,165.75 116.525,165.225 L13.2 117.452,165.225 118.977,166.75 119.5,166.75 L14.1@119.475,166.775 ; U7.16 119.35,168.954 119.35,166.9 L14.1@119.475,166.775 ; L14.1 L14.1@119.475,166.775
NetL14_2: L14.2 L15.1 U7.15 U7.18 | length 9.6
  Component Side w0.3: U7.15 118.734,169.734 119,170 120.385,170 120.684,169.701 U7.18 120.684,166.75 ; L14.2 120.283,165.225 120.684,165.625 120.684,166.75 ; L15.1 120.709,166.775 120.684,166.75
NetL15_2: L15.2 L16.1 U7.17 U7.20 | length 17.4
  Component Side w0.3: v1(120,168) 120,167.892 120.034,167.859 U7.17 ; v1(120.11,163.75) 121.192,163.75 121.833,164.391 L15.2 L16.1 ; v1(121.573,170.75) 122,170.323 121.984,170.306 U7.20
  Solder Side w0.3: v1(120,168) 120,166.75 ; v1(120.11,163.75) 120,163.86 120,166.75 ; v1(121.573,170.75) 121.573,168.323 120,166.75
SCL: J1.4 R2.1 U1.6 U2.1 U3.1 U4.7 U5.3 U6.1 U7.1 | length 85.9
  Component Side w0.3: v2(112.116,222.783) 112.135,222.764 U1.6 ; U3.1 122.393,218.075 v2(122.453,218.135) ; U2.1 122.487,228.075 v2(122.555,228.143) ; U6.1 123.056,192.235 123.393,192.235 ; v2(123.165,202.844) 123.165,201.51 U4.7 ; v1(123.393,191.745) 123.393,192.235 ; U7.1 125.514,174.388 130.048,178.922 130.048,180.035 130.2,180.187 130.2,180.195 130.705,180.7 U5.3 132.279,180.7 v1(132.283,180.696) ; J1.4 125.295,192.19 R2.1 123.393,192.235
  Solder Side w0.3: v2(112.116,222.783) 112.116,221.996 112.598,221.513 122.301,221.513 122.453,221.361 ; v2(122.555,228.143) 121.768,227.355 121.768,225.222 122.453,224.536 122.453,221.361 ; v1(123.393,191.745) 123.165,191.973 v2(123.165,202.844) 123.165,203.987 122.504,204.648 122.504,218.084 v2(122.453,218.135) 122.453,221.361 ; J1.4 129.617,191.033 131.623,191.033 132.35,190.306 132.35,180.762 v1(132.283,180.696)
SDA: J1.3 R1.1 U1.5 U2.3 U3.3 U4.8 U5.4 U6.3 U7.3 | length 93.5
  Component Side w0.3: v2(113.386,222.783) 113.405,222.764 U1.5 ; U3.3 123.483,216.775 v2(123.571,216.687) ; U2.3 123.516,226.775 v2(123.571,226.72) ; U6.3 121.477,190.663 122.415,189.725 ; U7.3 123.284,175.074 123.698,175.489 125.702,175.489 126.365,176.152 126.365,179.784 127.281,180.7 U5.4 128.4,181.404 v1(128.397,181.407) ; v1(123.284,189.713) 123.271,189.725 122.415,189.725 ; v2(124.435,202.844) 124.445,202.834 U4.8 ; J1.3 126.495,187.685 R1.1 124.456,187.685 122.415,189.725
  Solder Side w0.3: v2(113.386,222.783) 113.386,224.886 117.354,228.854 123.038,228.854 123.571,228.321 v2(123.571,226.72) v2(123.571,216.687) 123.571,205.08 124.409,204.241 124.409,202.87 v2(124.435,202.844) 124.435,190.864 v1(123.284,189.713) ; v1(128.397,181.407) 127.11,182.694 127.11,185.543 127.125,185.557 127.125,186.096 127.11,186.11 127.11,188.048 127.127,188.065 127.127,188.493 128.284,189.65 J1.3
X0: J1.5 U4.2 U4.3 | length 16.2
  Component Side w0.3: U4.2 U4.3 118.095,200.37 119.482,198.984 125.457,198.984 126.721,197.72 126.721,195.885 127.875,194.73 J1.5
X1: J1.6 U4.4 | length 11.5
  Component Side w0.3: U4.4 119.365,200.446 119.837,199.974 125.756,199.974 J1.6
X2: J1.7 U4.15 U4.16 | length 17.3
  Component Side w0.3: U4.16 U4.15 116.825,205.044 117.754,204.114 124.539,204.114 128.46,200.193 J1.7
X3: J1.8 U4.14 | length 13.1
  Component Side w0.3: U4.14 118.034,206.939 118.034,205.791 118.821,205.003 125.324,205.003 127.977,202.35 J1.8
X4: J1.9 U2.5 U2.7 U2.9 U2.11 U2.14 U2.16 U2.18 U2.20 | length 40.2
  Component Side w0.3: U2.11 122.25,221.575 ; U2.9 122.28,222.875 122.385,222.98 ; U2.7 122.31,224.175 122.385,224.25 ; U2.5 122.16,225.475 122.385,225.25 122.385,224.25 ; v1(124.231,220.447) 124.231,221.499 124.155,221.575 ; v1(126.441,206.172) 127.178,206.172 J1.9 ; U2.14 125.115,221.575 ; U2.16 125.153,222.875 125.115,222.912 ; U2.18 125.19,224.175 125.115,224.25 ; U2.20 125.34,225.475 125.115,225.25 125.115,224.25 ; 122.25,221.575 124.155,221.575 ; 122.25,221.575 122.385,221.71 122.385,222.98 ; 122.385,222.98 122.385,224.25 ; 124.155,221.575 125.115,221.575 ; 125.115,221.575 125.115,222.912 ; 125.115,222.912 125.115,224.25
  Solder Side w0.3: v1(124.231,220.447) 124.257,220.472 124.257,220.523 126.441,218.338 v1(126.441,206.172)
X5: C1.2 C2.2 C3.2 C4.2 C5.2 C6.2 C7.2 C8.2 J1.10 | length 53.8
  Component Side w0.3: 116.8,219.953 C4.2 C3.2 C2.2 C1.2 ; J1.10@128.587,207.43 J1.10 128.46,208.415 127.732,209.144 116.606,209.144 115.824,209.926 115.824,219.304 116.273,219.753 118.102,219.753 118.105,219.75 130.175,219.75 130.7,220.275 C5.2 C6.2 C7.2 C8.2
X6: J1.11 U3.5 U3.7 U3.9 U3.11 U3.14 U3.16 U3.18 U3.20 | length 30.5
  Component Side w0.3: U3.11 122.453,211.575 ; U3.9 122.426,212.875 122.453,212.903 ; U3.7 122.43,214.175 122.453,214.198 ; U3.5 122.04,215.475 122.453,215.062 122.453,214.198 ; U3.14 125.095,211.575 ; U3.16 125.174,212.875 125.12,212.928 ; U3.18 125.173,214.175 125.12,214.122 ; U3.20 125.457,215.475 125.12,215.138 125.12,214.122 ; J1.11 131,209.5 130.442,210.058 125.552,210.058 125.095,210.515 125.095,211.575 ; 122.453,211.575 122.453,212.903 ; 122.453,211.575 125.095,211.575 ; 122.453,212.903 122.453,214.198 ; 125.095,211.575 125.12,211.6 125.12,212.928 ; 125.12,212.928 125.12,214.122
X7: C9.2 C10.2 C11.2 C12.2 C13.2 C14.2 C15.2 C16.2 J1.12 | length 37.5
  Component Side w0.3: C12.2 C11.2 C10.2 C9.2 116.8,218.73 117.323,219.253 117.895,219.253 117.898,219.25 129.7,219.25 C16.2 C15.2 C14.2 C13.2 131.6,211.5 132.35,210.75 132.35,205.223 132.004,204.876 131.99,204.89 J1.12
X8: J1.13 L1.2 U6.5 | length 23.7
  Component Side w0.3: U6.5 120.177,193.244 120.825,193.891 124.039,193.891 ; L1.2@124.848,194.7 124.148,194 124.039,193.891 ; v1@126.712,193.514 v1(126.721,193.523) 126.352,193.891 124.039,193.891
  Solder Side w0.3: v1(126.721,193.523) 126.721,194.817 127.784,195.88 131.436,195.88 132.867,197.311 132.867,201.498 132.016,202.35 J1.13
X9: J1.14 L8.2 U6.19 | length 31
  Component Side w0.3: U6.19 119.527,186.416 120.117,185.826 v1(126.475,185.826) 126.5,185.801 126.5,182.778 125.753,182.032 L8.2 L8.2@124.848,182.032
  Solder Side w0.3: v1(126.475,185.826) 125.679,186.622 125.679,197.193 127.108,198.622 129.788,198.622 130.976,199.81 J1.14
X10: J1.15 L16.2 U7.19 | length 42.5
  Component Side w0.3: U7.19 121.334,167.859 121.442,167.75 124.25,167.75 ; L16.2 124.25,167.75 ; J1.15 131.98,197.27 134.061,195.189 134.061,174.061 127.75,167.75 124.25,167.75
X11: J1.16 L9.2 U7.5 | length 30.4
  Component Side w0.3: U7.5 121.984,175.247 122.377,175.641 122.796,175.641 123.63,176.475 L9.2 124.457,176.682 v1(125.679,176.682)
  Solder Side w0.3: v1(125.679,176.682) 130.432,176.682 133,179.25 133,193.75 132.02,194.73 J1.16
X12: J1.17 U5.1 | length 16.6
  Component Side w0.3: J1.17 131.66,192.19 133.477,190.373 ; U5.1 132.55,178.8 133.477,179.727 ; 133.491,179.727 133.491,190.373
X13: J1.18 U5.6 | length 14.1
  Component Side w0.3: U5.6 128.795,178.8 129.515,179.52 129.515,180.551 132.918,183.955 ; J1.18 131.589,189.65 132.918,188.321 ; 132.92,183.955 132.92,188.321
X14: J1.19 J2.21 | length 33.4
  Component Side w0.3: J2.21 112.242,188.621 113.368,187.495 113.368,181.272 114.325,180.315 126.188,180.315 128.119,182.245 130.501,182.245 132.35,184.094 132.35,186.572 131.518,187.404 131.294,187.404 J1.19
X15: J1.20 J2.19 | length 29
  Component Side w0.3: J2.19 113.868,189.052 113.868,181.707 114.702,180.873 126.04,180.873 127.945,182.778 129.208,182.778 J1.20
pads on no net: J2.1 J2.2 J2.3 J2.4 J2.5 J2.6 J2.7 J2.8 J2.9 J2.10 J2.11 J2.12 J2.13 J2.14 J2.15 J2.16 J2.17 J2.18 J2.20 J2.22 J2.23 J2.24 J2.25 J2.26 J2.27 J2.28 J2.29 J2.30 MH1.1 MH2.1 U4.1 U4.13

## Polygon pours and split planes (outlines as drawn)
GND on Ground Plane (split plane): 134.49,162.51 105.51,162.51 105.51,229.49 134.49,229.49
+5 on Power Plane (split plane): 134.49,162.51 105.51,162.51 105.51,229.49 134.49,229.49

## Silkscreen, mask and mechanical layers (free items; w line width, h text height)
Bottom Overlay:
  text "Virtual Component Dynamic Complex Modulo" at 115.562,219.118 h1.2 r90
  text "2 100k Resistors / 2 Capacitors / 2 Inductors / 1 DAC / 1 ADC" at 125.722,219.118 h1 r90
Board Layout:
  the board outline again, w0.1

## Text inside footprints (layer, text, board x,y; h text height)
J1: Top Overlay "1" at 127,182.5 h1 r270
J2: Top Overlay "1" at 113.75,214.25 h1